# Altium PCB Inverter.PcbDoc (part 3 of 3)
Units mm, origin at the board's own origin, x right, y up, seen from the top; angles counter-clockwise.
Board outline 150 x 100 mm, 2 copper layers (Top Layer, Bottom Layer), stack 1.74 mm thick; 301 components, 198 nets, 1184 pads, 813 vias.
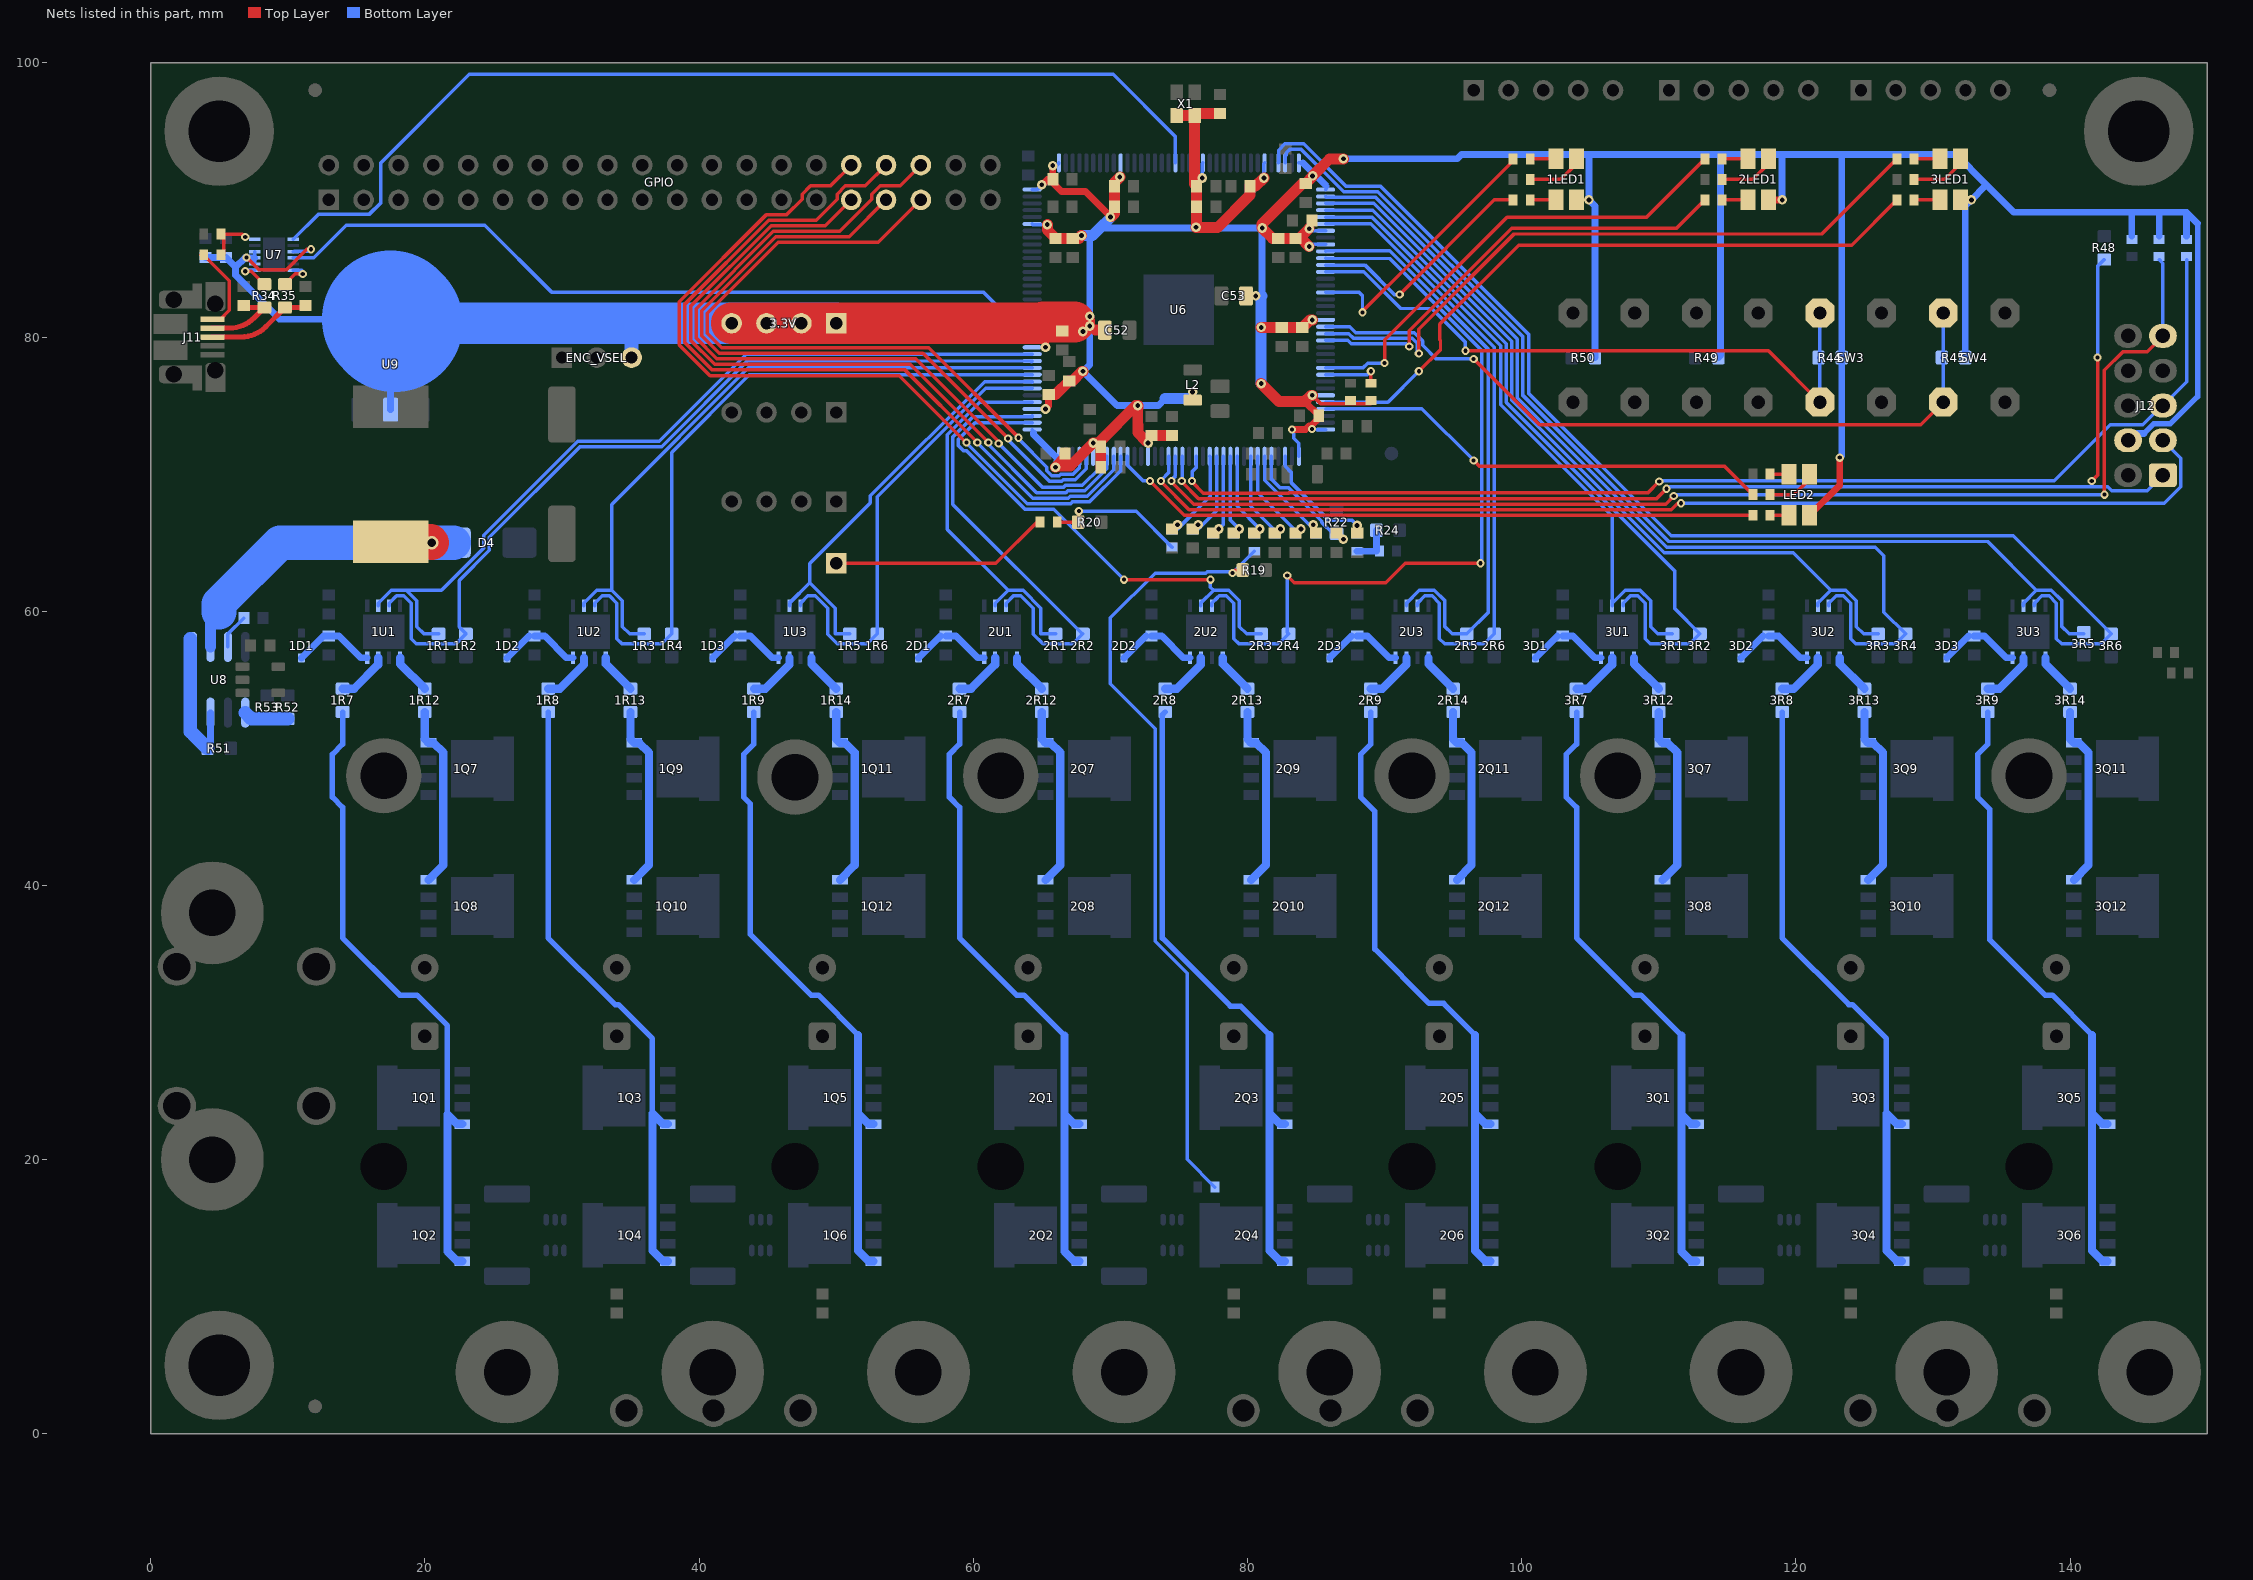
[diagram p3: the nets of this part, all layers, seen from the top]

## Via types
v1: diameter 0.7, hole 0.3, Top Layer to Bottom Layer, 475 vias
v2: diameter 0.7, hole 0.35, Top Layer to Bottom Layer, 233 vias
v3: diameter 0.6, hole 0.3, Top Layer to Bottom Layer, 78 vias
v4: diameter 1.27, hole 0.5, Top Layer to Bottom Layer, 24 vias
v5: diameter 1, hole 0.6, Top Layer to Bottom Layer, 3 vias

## Nets (pads, with @x,y where several pads share a name; then routed paths per layer and width w, separated by ;. In a path a pad name is that pad's centre, name@x,y a point inside that pad or via, vN(x,y) a via of type N, cw(c..) or ccw(c..) an arc to the next point about the centre after c; other vN are vias at no path point) (continued)
LEDG1: 1R16.2 U6.124 | length 19.8
  Top Layer w0.254: v3(88.39,81.8) 88.39,81.867 90.249,83.726 90.262,83.726 99.248,92.711 99.248,92.873 1R16.2@99.375,93
  Bottom Layer w0.254: U6.124@85.7,83.25 88.14,83.25 88.39,83 v3(88.39,81.8)
LEDG2: 2R16.2 U6.135 | length 35
  Top Layer w0.254: v3(90,78.1) 90,79.799 98.933,88.732 109.107,88.732 2R16.2@113.375,93
  Bottom Layer w0.254: U6.135@85.7,77.75 88.431,77.75 88.781,78.1 v3(90,78.1)
LEDG3: 3R16.2 U6.130 | length 49.6
  Top Layer w0.254: v3(92.5,78.8) 92.5,80.575 99.438,87.513 121.888,87.513 3R16.2@127.375,93
  Bottom Layer w0.254: U6.130@85.7,80.25 87.397,80.25 87.733,79.914 92.005,79.914 92.379,79.54 92.379,78.921 v3(92.5,78.8)
LEDR1: 1R15.2 U6.120 | length 17.4
  Top Layer w0.254: v3(91.1,83.1) 98,90 1R15.2@99.375,90
  Bottom Layer w0.254: U6.120@85.7,85.25 88.57,85.25 90.72,83.1 v3(91.1,83.1)
LEDR2: 2R15.2 U6.131 | length 33
  Top Layer w0.254: v3(91.8,79.3) 91.8,80.449 99.27,87.919 111.294,87.919 2R15.2@113.375,90
  Bottom Layer w0.254: U6.131@85.7,79.75 87.322,79.75 87.564,79.508 91.592,79.508 v3(91.8,79.3)
LEDR3: 3R15.2 U6.140 | length 49
  Top Layer w0.254: v3(92.5,77.5) 94.079,79.079 94.079,79.74 94.021,79.799 94.021,80.946 99.775,86.7 124.075,86.7 3R15.2@127.375,90
  Bottom Layer w0.254: U6.140@85.7,75.25 90.25,75.25 v3(92.5,77.5)
NCONFIG: R45.1 SW4.2 U6.129 | length 55.5
  Top Layer w0.254: v3(96.5,78.4) 101.3,73.6 129.1,73.6 SW4.2@130.75,75.25
  Bottom Layer w0.254: U6.129@85.7,80.75 87.472,80.75 87.901,80.321 92.174,80.321 92.786,79.708 92.786,79.395 93.781,78.4 v3(96.5,78.4) ; SW4.2@130.75,75.25 130.75,78.4 R45.1@130.65,78.5 130.75,78.6 SW4.2@130.75,81.75
Net1C4_2: 1C4.2 1D1.K 1U1.8 | length 6.1
  Bottom Layer w0.5: 1D1.K@11,56.6 12.6,58.2 1C4.2@13,58.2 13.75,58.2 15.345,56.605 1U1.8@15.8,56.605
Net1C5_2: 1C5.2 1D2.K 1U2.8 | length 5.7
  Bottom Layer w0.5: 1D2.K@26,56.6 1C5.2@27.6,58.2 ; 1C5.2@28,58.2 28.75,58.2 30.345,56.605 1U2.8@30.8,56.605
Net1C6_2: 1C6.2 1D3.K 1U3.8 | length 5.7
  Bottom Layer w0.5: 1D3.K@41,56.6 1C6.2@42.6,58.2 ; 1C6.2@43,58.2 43.75,58.2 45.345,56.605 1U3.8@45.8,56.605
Net1LED1_1: 1LED1.1 1R15.1 | length 1.9
  Top Layer w0.254: 1R15.1@100.625,90 1LED1.1@102.5,90
Net1LED1_2: 1LED1.2 1R16.1 | length 1.9
  Top Layer w0.254: 1R16.1@100.625,93 1LED1.2@102.5,93
Net1LED1_3: 1LED1.3 1R17.1 | length 4.2
  Top Layer w0.254: 1R17.1@100.625,91.5 102.859,91.5 104,92.641 1LED1.3@104,93
Net1Q1_G: 1Q1.G 1Q2.G 1R7.1 | length 46.6
  Bottom Layer w0.4: 1R7.1@14,52.65 14,50.303 13.25,49.553 13.25,46.447 14,45.697 14,36.172 18.172,32 19.419,32 21.65,29.769 21.65,23.308
  Bottom Layer w0.6: 1Q2.G@22.725,12.595 22.363,12.595 21.65,13.308 21.65,23.308 22.363,22.595 1Q1.G@22.725,22.595
Net1Q3_G: 1Q3.G 1Q4.G 1R8.1 | length 45.5
  Bottom Layer w0.4: 1R8.1@29,52.65 29,36.172 33.872,31.3 34.119,31.3 36.6,28.819 36.6,23.358
  Bottom Layer w0.6: 1Q4.G@37.725,12.595 37.363,12.595 36.6,13.358 36.6,23.358 37.363,22.595 1Q3.G@37.725,22.595
Net1Q5_G: 1Q5.G 1Q6.G 1R9.1 | length 46.3
  Bottom Layer w0.4: 1R9.1@44,52.65 44,50.303 43.25,49.553 43.25,46.447 43.727,45.97 43.727,36.445 48.172,32 48.7,32 51.6,29.1
  Bottom Layer w0.6: 51.6,29.1 51.6,23.358 ; 1Q6.G@52.725,12.595 52.363,12.595 51.6,13.358 51.6,23.358 ; 1Q5.G@52.725,22.595 52.363,22.595 51.6,23.358
Net1Q7_G: 1Q7.G 1Q8.G 1R12.1 | length 13.5
  Bottom Layer w0.6: 1R12.1@20,52.65 20,50.68 1Q7.G@20.275,50.405 20.637,50.405 21.35,49.692 21.35,41.48 1Q8.G@20.275,40.405
Net1Q9_G: 1Q9.G 1Q10.G 1R13.1 | length 13.5
  Bottom Layer w0.6: 1R13.1@35,52.65 35,50.68 1Q9.G@35.275,50.405 35.637,50.405 36.35,49.692 36.35,41.48 1Q10.G@35.275,40.405
Net1Q11_G: 1Q11.G 1Q12.G 1R14.1 | length 13.5
  Bottom Layer w0.6: 1R14.1@50,52.65 50,50.68 1Q11.G@50.275,50.405 50.637,50.405 51.35,49.692 51.35,41.48 1Q12.G@50.275,40.405
Net1R7_2: 1R7.2 1U1.7 | length 3.8
  Bottom Layer w0.6: 1R7.2@14,54.35 14.852,54.35 16.6,56.098 1U1.7@16.6,56.605
Net1R8_2: 1R8.2 1U2.7 | length 3.8
  Bottom Layer w0.6: 1R8.2@29,54.35 29.852,54.35 31.6,56.098 1U2.7@31.6,56.605
Net1R9_2: 1R9.2 1U3.7 | length 3.8
  Bottom Layer w0.6: 1R9.2@44,54.35 44.852,54.35 46.6,56.098 1U3.7@46.6,56.605
Net1R12_2: 1R12.2 1U1.5 | length 3
  Bottom Layer w0.6: 1U1.5@18.2,56.605 18.2,56.15 1R12.2@20,54.35
Net1R13_2: 1R13.2 1U2.5 | length 3
  Bottom Layer w0.6: 1U2.5@33.2,56.605 33.2,56.15 1R13.2@35,54.35
Net1R14_2: 1R14.2 1U3.5 | length 3
  Bottom Layer w0.6: 1U3.5@48.2,56.605 48.2,56.15 1R14.2@50,54.35
Net2C4_2: 2C4.2 2D1.K 2U1.8 | length 5.7
  Bottom Layer w0.5: 2D1.K@56,56.6 2C4.2@57.6,58.2 ; 2C4.2@58,58.2 58.75,58.2 60.345,56.605 2U1.8@60.8,56.605
Net2C5_2: 2C5.2 2D2.K 2U2.8 | length 5.7
  Bottom Layer w0.5: 2D2.K@71,56.6 2C5.2@72.6,58.2 ; 2C5.2@73,58.2 73.75,58.2 75.345,56.605 2U2.8@75.8,56.605
Net2C6_2: 2C6.2 2D3.K 2U3.8 | length 5.7
  Bottom Layer w0.5: 2D3.K@86,56.6 2C6.2@87.6,58.2 ; 2C6.2@88,58.2 88.75,58.2 90.345,56.605 2U3.8@90.8,56.605
Net2LED1_1: 2LED1.1 2R15.1 | length 1.9
  Top Layer w0.254: 2R15.1@114.625,90 2LED1.1@116.5,90
Net2LED1_2: 2LED1.2 2R16.1 | length 1.9
  Top Layer w0.254: 2R16.1@114.625,93 2LED1.2@116.5,93
Net2LED1_3: 2LED1.3 2R17.1 | length 4.2
  Top Layer w0.254: 2R17.1@114.625,91.5 116.859,91.5 118,92.641 2LED1.3@118,93
Net2Q1_G: 2Q1.G 2Q2.G 2R7.1 | length 46.2
  Bottom Layer w0.4: 2R7.1@59,52.65 59,50.303 58.25,49.553 58.25,46.447 59,45.697 59,36.172 63.172,32 63.7,32 66.65,29.05
  Bottom Layer w0.6: 66.65,29.05 66.65,23.308 ; 2Q2.G@67.725,12.595 67.363,12.595 66.65,13.308 66.65,23.308 ; 2Q1.G@67.725,22.595 67.363,22.595 66.65,23.308
Net2Q3_G: 2Q3.G 2Q4.G 2R8.1 | length 45.9
  Bottom Layer w0.4: 2R8.1@74,52.65 73.8,52.45 73.8,36.62 73.8,36.151 78.751,31.2 79.5,31.2 81.6,29.1
  Bottom Layer w0.6: 81.6,29.1 81.6,23.358 ; 2Q4.G@82.725,12.595 82.363,12.595 81.6,13.358 81.6,23.358 ; 2Q3.G@82.725,22.595 82.363,22.595 81.6,23.358
Net2Q5_G: 2Q5.G 2Q6.G 2R9.1 | length 46.6
  Bottom Layer w0.4: 2R9.1@89,52.65 89,50.303 88.25,49.553 88.25,46.447 89.3,45.397 89.3,35.351 93.251,31.4 94.3,31.4 96.6,29.1
  Bottom Layer w0.6: 96.6,29.1 96.6,23.358 ; 2Q6.G@97.725,12.595 97.363,12.595 96.6,13.358 96.6,23.358 ; 2Q5.G@97.725,22.595 97.363,22.595 96.6,23.358
Net2Q7_G: 2Q7.G 2Q8.G 2R12.1 | length 13.5
  Bottom Layer w0.6: 2R12.1@65,52.65 65,50.68 2Q7.G@65.275,50.405 65.637,50.405 66.35,49.692 66.35,41.48 2Q8.G@65.275,40.405
Net2Q9_G: 2Q9.G 2Q10.G 2R13.1 | length 13.5
  Bottom Layer w0.6: 2R13.1@80,52.65 80,50.68 2Q9.G@80.275,50.405 80.637,50.405 81.35,49.692 81.35,41.48 2Q10.G@80.275,40.405
Net2Q11_G: 2Q11.G 2Q12.G 2R14.1 | length 13.5
  Bottom Layer w0.6: 2R14.1@95,52.65 95,50.68 2Q11.G@95.275,50.405 95.637,50.405 96.35,49.692 96.35,41.48 2Q12.G@95.275,40.405
Net2R7_2: 2R7.2 2U1.7 | length 3.8
  Bottom Layer w0.6: 2R7.2@59,54.35 59.852,54.35 61.6,56.098 2U1.7@61.6,56.605
Net2R8_2: 2R8.2 2U2.7 | length 3.8
  Bottom Layer w0.6: 2R8.2@74,54.35 74.852,54.35 76.6,56.098 2U2.7@76.6,56.605
Net2R9_2: 2R9.2 2U3.7 | length 3.8
  Bottom Layer w0.6: 2R9.2@89,54.35 89.852,54.35 91.6,56.098 2U3.7@91.6,56.605
Net2R12_2: 2R12.2 2U1.5 | length 3
  Bottom Layer w0.6: 2U1.5@63.2,56.605 63.2,56.15 2R12.2@65,54.35
Net2R13_2: 2R13.2 2U2.5 | length 3
  Bottom Layer w0.6: 2U2.5@78.2,56.605 78.2,56.15 2R13.2@80,54.35
Net2R14_2: 2R14.2 2U3.5 | length 3
  Bottom Layer w0.6: 2U3.5@93.2,56.605 93.2,56.15 2R14.2@95,54.35
Net3C4_2: 3C4.2 3D1.K 3U1.8 | length 5.7
  Bottom Layer w0.5: 3D1.K@101,56.6 3C4.2@102.6,58.2 ; 3C4.2@103,58.2 103.75,58.2 105.345,56.605 3U1.8@105.8,56.605
Net3C5_2: 3C5.2 3D2.K 3U2.8 | length 5.7
  Bottom Layer w0.5: 3D2.K@116,56.6 3C5.2@117.6,58.2 ; 3C5.2@118,58.2 118.75,58.2 120.345,56.605 3U2.8@120.8,56.605
Net3C6_2: 3C6.2 3D3.K 3U3.8 | length 5.7
  Bottom Layer w0.5: 3D3.K@131,56.6 3C6.2@132.6,58.2 ; 3C6.2@133,58.2 133.75,58.2 135.345,56.605 3U3.8@135.8,56.605
Net3LED1_1: 3LED1.1 3R15.1 | length 1.9
  Top Layer w0.254: 3R15.1@128.625,90 3LED1.1@130.5,90
Net3LED1_2: 3LED1.2 3R16.1 | length 1.9
  Top Layer w0.254: 3R16.1@128.625,93 3LED1.2@130.5,93
Net3LED1_3: 3LED1.3 3R17.1 | length 4.2
  Top Layer w0.254: 3R17.1@128.625,91.5 130.859,91.5 132,92.641 3LED1.3@132,93
Net3Q1_G: 3Q1.G 3Q2.G 3R7.1 | length 46.2
  Bottom Layer w0.4: 3R7.1@104,52.65 104,50.303 103.25,49.553 103.25,46.447 104,45.697 104,36.172 108.172,32 108.7,32 111.65,29.05
  Bottom Layer w0.6: 111.65,29.05 111.65,23.308 ; 3Q2.G@112.725,12.595 112.363,12.595 111.65,13.308 111.65,23.308 ; 3Q1.G@112.725,22.595 112.363,22.595 111.65,23.308
Net3Q3_G: 3Q3.G 3Q4.G 3R8.1 | length 45.5
  Bottom Layer w0.4: 3R8.1@119,52.65 119,36.172 123.872,31.3 124.119,31.3 126.6,28.819 126.6,23.358
  Bottom Layer w0.6: 3Q4.G@127.725,12.595 127.363,12.595 126.6,13.358 126.6,23.358 127.363,22.595 3Q3.G@127.725,22.595
Net3Q5_G: 3Q5.G 3Q6.G 3R9.1 | length 46.3
  Bottom Layer w0.4: 3R9.1@134,52.65 134,50.303 133.25,49.553 133.25,46.447 134.127,45.57 134.127,36.045 138.172,32 138.7,32 141.6,29.1
  Bottom Layer w0.6: 141.6,29.1 141.6,23.358 ; 3Q6.G@142.725,12.595 142.363,12.595 141.6,13.358 141.6,23.358 ; 3Q5.G@142.725,22.595 142.363,22.595 141.6,23.358
Net3Q7_G: 3Q7.G 3Q8.G 3R12.1 | length 13.5
  Bottom Layer w0.6: 3R12.1@110,52.65 110,50.68 3Q7.G@110.275,50.405 110.637,50.405 111.35,49.692 111.35,41.48 3Q8.G@110.275,40.405
Net3Q9_G: 3Q9.G 3Q10.G 3R13.1 | length 13.5
  Bottom Layer w0.6: 3R13.1@125,52.65 125,50.68 3Q9.G@125.275,50.405 125.637,50.405 126.35,49.692 126.35,41.48 3Q10.G@125.275,40.405
Net3Q11_G: 3Q11.G 3Q12.G 3R14.1 | length 13.5
  Bottom Layer w0.6: 3R14.1@140,52.65 140,50.68 3Q11.G@140.275,50.405 140.637,50.405 141.35,49.692 141.35,41.48 3Q12.G@140.275,40.405
Net3R7_2: 3R7.2 3U1.7 | length 3.8
  Bottom Layer w0.6: 3R7.2@104,54.35 104.852,54.35 106.6,56.098 3U1.7@106.6,56.605
Net3R8_2: 3R8.2 3U2.7 | length 3.8
  Bottom Layer w0.6: 3R8.2@119,54.35 119.852,54.35 121.6,56.098 3U2.7@121.6,56.605
Net3R9_2: 3R9.2 3U3.7 | length 3.8
  Bottom Layer w0.6: 3R9.2@134,54.35 134.852,54.35 136.6,56.098 3U3.7@136.6,56.605
Net3R12_2: 3R12.2 3U1.5 | length 3
  Bottom Layer w0.6: 3U1.5@108.2,56.605 108.2,56.15 3R12.2@110,54.35
Net3R13_2: 3R13.2 3U2.5 | length 3
  Bottom Layer w0.6: 3U2.5@123.2,56.605 123.2,56.15 3R13.2@125,54.35
Net3R14_2: 3R14.2 3U3.5 | length 3
  Bottom Layer w0.6: 3U3.5@138.2,56.605 138.2,56.15 3R14.2@140,54.35
NetC12_2: C12.2 R22.1 U6.5 | length 8.1
  Bottom Layer w0.254: U6.5@81.75,71.3 81.75,69.631 82.36,69.021 82.969,69.021 85.429,66.561 85.429,66.471 86.25,65.65 R22.1@86.5,65.65
  other v2: 87,65.25
NetC13_2: C13.2 R25.1 U6.3 | length 8.8
  Bottom Layer w0.254: U6.3@82.75,71.3 82.75,70.568 83.179,70.139 83.179,69.391 85.95,66.621 87.629,66.621 v2(88,66.25) R25.1@88,65.625
NetC14_2: C14.2 R26.1 U6.6 | length 7.4
  Bottom Layer w0.254: U6.6@81.25,71.3 81.25,69.556 84.506,66.3 v2(84.8,66.3) 84.8,65.825 R26.1@85,65.625
NetC15_2: C15.2 R27.1 U6.7 | length 6.8
  Bottom Layer w0.254: U6.7@80.75,71.3 80.75,68.65 83.5,65.9 R27.1@83.5,65.625
  other v2: 83.9,66
NetC16_2: C16.2 R28.1 U6.8 | length 6.4
  Bottom Layer w0.254: U6.8@80.25,71.3 80.25,67.65 82,65.9 R28.1@82,65.625
  other v2: 82.4,66
NetC17_2: C17.2 R29.1 U6.10 | length 6
  Bottom Layer w0.254: U6.10@79.25,71.3 79.25,67.65 v2(80.9,66)
NetC18_2: C18.2 R30.1 U6.11 | length 5.6
  Bottom Layer w0.254: U6.11@78.75,71.3 78.75,66.65 v2(79.4,66)
NetC19_2: C19.2 R31.1 U6.12 | length 5.4
  Bottom Layer w0.254: v2(77.9,66) 78.25,66.35 U6.12@78.25,71.3
NetC20_2: C20.2 R32.1 U6.13 | length 5.9
  Bottom Layer w0.254: v2@76.4,66 77.75,67.35 U6.13@77.75,71.3
  other v2: 76.4,66.3
NetC21_2: C21.2 R33.1 U6.14 | length 6.5
  Bottom Layer w0.254: v2@74.9,66 77.289,68.389 77.289,71.261 U6.14@77.25,71.3 ; v2(74.9,66.3) v2@74.9,66.529
NetC42_2: C42.2 U8.3 | length 2.6
  Bottom Layer w0.254: U8.3@5.635,57.4 5.635,58.335 C42.2@6.8,59.5
NetD4_K: D4.K L1.2 U8.2 | length 25.4
  Top Layer w2.54: L1.2@17.5,65.075 20.425,65.075 v5(20.5,65)
  Bottom Layer w0.8: U8.2@4.365,57.4 4.365,59.265 5,59.9
  Bottom Layer w2.54: 4.978,59.922 4.978,60.539 9.438,65 v5(20.5,65) D4.K@22.1,65
NetJ11_1: J11.1 R36.2 | length 6.5
  Top Layer w0.254: R36.2@3.65,86 3.85,86 5.734,84.116 5.734,81.938 5.096,81.3 J11.1@4.525,81.3
NetLED2_1: LED2.1 R38.1 | length 1.4
  Top Layer w0.254: R38.1@118.125,67 LED2.1@119.5,67
NetLED2_2: LED2.2 R39.1 | length 1.4
  Top Layer w0.254: R39.1@118.125,70 LED2.2@119.5,70
NetLED2_3: LED2.3 R40.1 | length 3.7
  Top Layer w0.254: R40.1@118.125,68.5 119.859,68.5 121,69.641 LED2.3@121,70
NetR18_1: R18.1 R20.2 R33.2 | length 10
  Top Layer w0.254: R18.1@66.35,66.5 R20.2@67.65,66.5 67.7,66.55 v3(67.7,67.3)
  Bottom Layer w0.254: v3(67.7,67.3) 71.875,67.3 R33.2@74.5,64.675
NetR18_2: R18.2 V_AUX.1 | length 15.9
  Top Layer w0.254: V_AUX.1@50,63.5 61.65,63.5 R18.2@64.65,66.5
NetR19_1: R19.1 R21.2 R29.2 | length 58.1
  Top Layer w0.254: v3(78.904,62.779) 79.125,63 R19.1@79.65,63
  Bottom Layer w0.254: R21.2@77.625,18 75.609,20.016 75.609,33.597 73.273,35.933 73.273,36.402 73.273,51.427 70,54.7 70,59.512 73.267,62.779 76.96,62.779 77.06,62.879 78.804,62.879 v3(78.904,62.779) R29.2@80.5,64.375
NetR23_1: R23.1 R24.2 R25.2 | length 2.9
  Bottom Layer w0.5: R25.2@88,64.375 89.375,64.375 89.4,64.4 R24.2@89.4,65.9
NetR34_1: R34.1 U7.1 | length 2.5
  Top Layer w0.254: v3(6.9,84.8) 7.35,84.8 R34.1@8.3,83.85
  Bottom Layer w0.254: v3(6.9,84.8) 6.975,84.875 U7.1@7.585,84.875
NetR35_1: R35.1 U7.12 | length 2.5
  Top Layer w0.254: R35.1@9.8,83.85 10.55,84.6 v3(11.1,84.6)
  Bottom Layer w0.254: U7.12@10.415,84.875 11.025,84.875 11.1,84.8 v3(11.1,84.6)
NetR36_1: R36.1 R37.2 U7.6 | length 3.1
  Top Layer w0.254: R36.1@5.35,86 5.35,87.5 6.7,87.5 v3(6.9,87.3)
NetR51_1: R51.1 U8.1 U8.7 U8.8 | length 11
  Bottom Layer w0.254: R51.1@4.15,50 R51.1@4.365,50.215
  Bottom Layer w0.5: R51.1@4.365,50.215 U8.7@4.365,52.6
  Bottom Layer w1: 2.895,51.2 U8.1@2.895,58 ; 3.095,51.055 R51.1@4.15,50
NetR52_2: R52.2 R53.2 U8.5 | length 3.3
  Bottom Layer w1: U8.5@6.905,52.6 7.355,52.15 R53.2@8.5,52.15 R52.2@10,52.15
NSTATUS: R47.1 U6.136 | length 4.1
  Top Layer w0.254: R47.1@89,76.85 v3(89,77.5)
  Bottom Layer w0.254: U6.136@85.7,77.25 88.75,77.25 v3(89,77.5)
PWM_AH1: 1R1.2 1U1.2 U6.48 | length 60.8
  Bottom Layer w0.254: 1U1.2@16.6,60.395 16.6,60.59 17.541,61.531 18.634,61.531 ; 1R1.2@21,58.35 19.936,58.35 19.406,58.88 19.406,60.758 18.634,61.531 ; U6.48@64.3,78.75 43.45,78.75 37.106,72.406 31.148,72.406 24.294,65.552 24.294,64.61 21.215,61.531 18.634,61.531
PWM_AH2: 2R1.2 2U1.2 U6.41 | length 27.8
  Bottom Layer w0.254: 2U1.2@61.6,60.395 61.6,60.59 62.541,61.531 ; U6.41@64.3,75.25 60.481,75.25 58.108,72.877 58.108,65.964 62.541,61.531 ; 2R1.2@66,58.35 64.936,58.35 64.936,60.229 63.634,61.531 62.541,61.531
PWM_AH3: 3R1.2 3U1.2 U6.113 | length 46.4
  Bottom Layer w0.254: U6.113@85.7,88.75 89.068,88.75 98.468,79.35 98.468,75.058 106.6,66.926 3U1.2@106.6,60.395 106.6,60.59 107.541,61.531 108.634,61.531 109.406,60.758 109.406,58.88 109.936,58.35 3R1.2@111,58.35
PWM_AL1: 1R2.2 1U1.3 U6.47 | length 62.5
  Bottom Layer w0.254: 1U1.3@17.4,60.395 17.4,60.59 17.934,61.124 18.466,61.124 19,60.59 19,58 19.379,57.621 22.271,57.621 1R2.2@23,58.35 22.5,58.85 22.5,62.241 24.7,64.441 24.7,65.384 31.316,72 37.275,72 43.525,78.25 U6.47@64.3,78.25 U6.47@64.229,78.179
PWM_AL2: 2R2.2 2U1.3 U6.39 | length 33.7
  Bottom Layer w0.254: 2U1.3@62.4,60.395 62.4,60.59 62.934,61.124 63.466,61.124 64.379,60.211 64.379,58.332 65.091,57.621 67.271,57.621 2R2.2@68,58.35 67.95,58.35 58.514,67.786 58.514,72.708 59.985,74.179 64.3,74.179 U6.39@64.3,74.25
PWM_AL3: 3R2.2 3U1.3 U6.112 | length 53.5
  Bottom Layer w0.254: U6.112@85.7,89.25 89.143,89.25 98.874,79.519 98.874,75.227 111.179,62.922 111.179,60.171 3R2.2@113,58.35 112.271,57.621 109.379,57.621 109,58 109,60.59 108.466,61.124 107.934,61.124 107.4,60.59 3U1.3@107.4,60.395
PWM_BH1: 1R3.2 1U2.2 U6.46 | length 48.5
  Bottom Layer w0.254: 1U2.2@31.6,60.395 31.6,60.59 32.541,61.531 33.634,61.531 ; 1R3.2@36,58.35 34.936,58.35 34.406,58.88 34.406,60.758 33.634,61.531 ; U6.46@64.3,77.75 43.6,77.75 33.634,67.785 33.634,61.531
PWM_BH2: 2R3.2 2U2.2 U6.38 | length 37.1
  Top Layer w0.254: v3(71,62.3) v3(77.3,62.3)
  Bottom Layer w0.254: U6.38@64.3,73.75 60.131,73.75 58.92,72.54 58.92,72.06 59.26,71.72 59.485,71.72 63.774,67.432 65.868,67.432 v3(71,62.3) ; 2U2.2@76.6,60.395 76.6,60.6 77.531,61.531 ; v3(77.3,62.3) 77.3,61.762 77.531,61.531 ; 2R3.2@81,58.35 79.936,58.35 79.406,58.88 79.406,60.758 78.634,61.531 77.531,61.531
PWM_BH3: 3R3.2 3U2.2 U6.111 | length 58.4
  Bottom Layer w0.254: U6.111@85.7,89.75 89.218,89.75 99.281,79.687 99.281,75.395 110.403,64.273 119.798,64.273 122.541,61.531 ; 3U2.2@121.6,60.395 121.6,60.59 122.541,61.531 ; 3R3.2@126,58.35 124.936,58.35 124.406,58.88 124.406,60.758 123.634,61.531 122.541,61.531
PWM_BL1: 1R4.2 1U2.3 U6.45 | length 51.2
  Bottom Layer w0.254: 1U2.3@32.4,60.395 32.4,60.59 32.934,61.124 33.466,61.124 34,60.59 34,58 34.379,57.621 37.271,57.621 1R4.2@38,58.35 38,71.576 43.674,77.25 U6.45@64.3,77.25
PWM_BL2: 2R4.2 2U2.3 U6.119 | length 58.3
  Top Layer w0.254: v3(82.9,62.6) 83.427,62.073 90.073,62.073 91.5,63.5 v3(97,63.5)
  Bottom Layer w0.254: 2U2.3@77.4,60.395 77.4,60.59 77.814,61.004 ; 77.771,60.961 77.934,61.124 78.466,61.124 79,60.59 79,58 79.379,57.621 82.271,57.621 2R4.2@83,58.35 82.9,58.45 v3(82.9,62.6) ; U6.119@85.7,85.75 85.7,85.727 90.367,85.727 97.079,79.015 97.079,63.579 v3(97,63.5)
PWM_BL3: 3R4.2 3U2.3 U6.110 | length 69.7
  Bottom Layer w0.254: U6.110@85.7,90.25 85.749,90.201 89.342,90.201 99.687,79.855 99.687,75.563 110.571,64.679 125.781,64.679 126.421,64.04 126.421,59.929 3R4.2@128,58.35 127.271,57.621 124.379,57.621 124,58 124,60.59 123.466,61.124 122.934,61.124 122.4,60.59 3U2.3@122.4,60.395
PWM_CH1: 1R5.2 1U3.2 U6.44 | length 31.3
  Bottom Layer w0.254: 1U3.2@46.6,60.395 46.6,60.6 48.082,62.082 ; 1R5.2@51,58.35 49.936,58.35 49.936,60.229 48.082,62.082 ; U6.44@64.3,76.706 U6.44@64.3,76.75 60.832,76.75 52.5,68.418 52.5,67.895 48.082,63.478 48.082,62.082
PWM_CH2: 2R5.2 2U3.2 U6.118 | length 43.7
  Bottom Layer w0.254: U6.118@85.7,86.25 85.733,86.283 90.385,86.283 97.579,79.089 97.579,59.929 2R5.2@96,58.35 94.936,58.35 94.406,58.88 94.406,60.758 93.634,61.531 92.541,61.531 91.6,60.59 2U3.2@91.6,60.395
PWM_CH3: 3R5.2 3U3.2 U6.106 | length 78.9
  Bottom Layer w0.254: U6.106@82.75,92.7 82.75,93.249 82.821,93.249 82.821,93.428 83.072,93.679 83.937,93.679 87.009,90.607 89.51,90.607 100.094,80.024 100.094,75.732 110.739,65.086 133.986,65.086 137.541,61.531 ; 3U3.2@136.6,60.395 136.6,60.59 137.541,61.531 ; 3R5.2@141,58.35 139.936,58.35 139.406,58.88 139.406,60.758 138.634,61.531 137.541,61.531
PWM_CL1: 1R6.2 1U3.3 U6.43 | length 33.4
  Bottom Layer w0.254: 1U3.3@47.4,60.395 47.4,60.59 47.934,61.124 48.466,61.124 49.379,60.211 49.379,58.332 50.091,57.621 52.271,57.621 1R6.2@53,58.35 53,68.344 60.906,76.25 U6.43@64.3,76.25
PWM_CL2: 2R6.2 2U3.3 U6.114 | length 46.2
  Bottom Layer w0.254: U6.114@85.7,88.25 88.994,88.25 98,79.244 2R6.2@98,58.35 97.271,57.621 94.379,57.621 94,58 94,60.59 93.466,61.124 92.934,61.124 92.4,60.59 2U3.3@92.4,60.395
PWM_CL3: 3R6.2 3U3.3 U6.105 | length 88.5
  Bottom Layer w0.254: U6.105@82.25,92.7 82.279,92.729 82.279,93.631 82.734,94.086 84.105,94.086 87.177,91.013 89.679,91.013 100.5,80.192 100.5,75.9 110.908,65.492 135.858,65.492 3R6.2@143,58.35 142.271,57.621 139.379,57.621 139,58 139,60.59 138.466,61.124 137.934,61.124 137.4,60.59 3U3.3@137.4,60.395
RESET_N: R44.1 SW3.2 U6.121 | length 46.9
  Top Layer w0.254: v3(95.9,79) 118,79 SW3.2@121.75,75.25
  Bottom Layer w0.254: U6.121@85.7,84.75 88.496,84.75 91.166,82.079 93.44,82.079 95.9,79.619 v3(95.9,79) ; SW3.2@121.75,75.25 121.75,78.4 R44.1@121.65,78.5 121.75,78.6 SW3.2@121.75,81.75
RXD: U6.52 U7.10 | length 57.9
  Bottom Layer w0.254: U7.10@10.415,85.775 11.894,85.775 14.277,88.158 24.362,88.158 29.239,83.281 60.719,83.281 63.25,80.75 U6.52@64.3,80.75
SGPIO31: GPIO.31 U6.29 | length 54.1
  Top Layer w0.254: GPIO.31@51.1,90 49.219,88.119 45.259,88.119 39.381,82.242 39.381,79.758 41.138,78.001 55.418,78.001 61.1,72.319 v3(61.1,72.3)
  Bottom Layer w0.254: v3(61.1,72.3) 61.1,72.164 64.613,68.651 66.766,68.651 66.895,68.781 68.133,68.781 69.75,70.398 U6.29@69.75,71.3
SGPIO32: GPIO.32 U6.27 | length 59.1
  Top Layer w0.254: GPIO.32@51.1,92.54 49.589,91.029 48.134,91.029 47.531,90.426 47.531,90.055 46.408,88.932 44.922,88.932 38.569,82.579 38.569,79.421 40.801,77.189 54.611,77.189 v3(59.5,72.3)
  Bottom Layer w0.254: v3(59.5,72.3) 59.5,72.28 63.942,67.838 67.102,67.838 67.232,67.968 68.469,67.968 70.75,70.249 U6.27@70.75,71.3
SGPIO33: GPIO.33 U6.32 | length 52.4
  Top Layer w0.254: GPIO.33@53.64,90 50.946,87.306 45.595,87.306 40.194,81.905 40.194,80.095 41.475,78.814 56.333,78.814 v3(62.548,72.6)
  Bottom Layer w0.254: v3(62.548,72.6) 62.548,72.487 65.571,69.464 66.429,69.464 66.558,69.594 67.445,69.594 68.25,70.398 U6.32@68.25,71.3
SGPIO34: GPIO.34 U6.28 | length 59.7
  Top Layer w0.254: GPIO.34@53.64,92.54 52.129,91.029 50.674,91.029 50.071,90.426 50.071,90.055 48.541,88.526 45.09,88.526 38.975,82.41 38.975,79.59 40.97,77.595 55.024,77.595 60.3,72.32 v3(60.3,72.3)
  Bottom Layer w0.254: v3(60.3,72.3) 60.3,72.28 64.335,68.245 66.934,68.245 67.063,68.374 68.301,68.374 70.25,70.324 U6.28@70.25,71.3
SGPIO35: GPIO.35 U6.33 | length 53.2
  Top Layer w0.254: GPIO.35@56.18,90 53.08,86.9 45.764,86.9 40.601,81.737 40.601,80.263 41.643,79.221 56.746,79.221 63.3,72.667 v3(63.3,72.649)
  Bottom Layer w0.254: v3(63.3,72.649) 63.3,72.581 65.37,70.51 65.37,70.239 65.739,69.87 66.261,69.87 66.39,70 67.277,70 67.75,70.473 U6.33@67.75,71.3
SGPIO36: GPIO.36 U6.30 | length 58.5
  Top Layer w0.254: GPIO.36@56.18,92.54 54.669,91.029 53.214,91.029 52.611,90.426 52.611,90.055 50.269,87.713 45.427,87.713 39.788,82.074 39.788,79.926 41.306,78.408 55.811,78.408 61.854,72.365 v3(61.854,72.23)
  Bottom Layer w0.254: v3(61.854,72.23) 65.026,69.058 66.597,69.058 66.727,69.187 67.964,69.187 69.25,70.473 U6.30@69.25,71.3
STATUSLED_B: R40.2 U6.141 | length 33.8
  Top Layer w0.254: v3(96.5,71) 96.921,70.579 114.796,70.579 R40.2@116.875,68.5
  Bottom Layer w0.254: U6.141@85.7,74.75 85.729,74.779 92.721,74.779 v3(96.5,71)
STATUSLED_R: R38.2 U6.26 | length 47.8
  Top Layer w0.254: v3(72.9,69.5) 72.9,69.481 75.392,66.989 116.864,66.989 R38.2@116.875,67
  Bottom Layer w0.254: U6.26@71.25,71.3 71.25,70.643 72.393,69.5 v3(72.9,69.5)
TCK: J12.1 R48.2 U6.18 | length 91.9
  Top Layer w0.254: v3(75.205,69.5) 75.205,69.433 76.43,68.208 83.177,68.208 83.188,68.219 109.847,68.219 v3(110.564,68.936) ; v3(141.579,69.5) 142,69.921 v3(142,78.5)
  Bottom Layer w0.254: v3(75.205,69.5) 75.25,69.545 U6.18@75.25,71.3 ; v3(110.564,68.936) 110.708,69.079 142.74,69.079 143.042,68.777 145.627,68.777 J12.1@146.77,69.92 ; 141.579,69.079 v3(141.579,69.5) ; v3(142,78.5) 142,85.15 R48.2@142.5,85.65
TDI: J12.9 R42.1 U6.19 | length 91.1
  Top Layer w0.254: v3(74.452,69.5) 74.452,69.433 76.084,67.801 83.345,67.801 83.356,67.813 110.505,67.813 v3(111.096,68.404) ; v3(142.5,68.5) 142.5,77.579 143.858,78.937 145.627,78.937 J12.9@146.77,80.08
  Bottom Layer w0.254: v3(74.452,69.5) 74.452,69.567 74.75,69.865 U6.19@74.75,71.3 ; v3(111.096,68.404) 111.192,68.5 v3(142.5,68.5) ; R42.1@146.5,85.65 146.77,85.38 J12.9@146.77,80.08
TDO: J12.3 U6.20 | length 81.9
  Top Layer w0.254: v3(73.7,69.5) 73.7,69.433 75.738,67.395 83.513,67.395 83.525,67.406 110.918,67.406 111.383,67.872 v3(111.628,67.872)
  Bottom Layer w0.254: v3(73.7,69.5) 73.7,69.567 74.25,70.117 U6.20@74.25,71.3 ; v3(111.628,67.872) 146.87,67.872 148.065,69.067 148.065,71.165 J12.3@146.77,72.46
TMS: J12.5 R41.1 U6.16 | length 87.2
  Top Layer w0.254: v3(75.957,69.5) 75.957,69.433 76.776,68.614 83.008,68.614 83.02,68.626 109.19,68.626 v3(110.032,69.468)
  Bottom Layer w0.254: v3(75.957,69.5) 75.957,70.18 76.25,70.473 U6.16@76.25,71.3 ; v3(110.032,69.468) 110.079,69.515 138.847,69.515 142.935,73.603 145.287,73.603 146.684,75 J12.5@146.77,75 148.5,76.73 R41.1@148.5,85.65
TXD: U6.90 U7.7 | length 74.8
  Bottom Layer w0.254: U7.7@10.415,87.125 12.261,88.971 15.966,88.971 16.8,89.804 16.8,92.716 23.247,99.163 70.202,99.163 74.75,94.615 U6.90@74.75,92.7
USB_N: C22.2 J11.2 R34.2 | length 5.8
  Top Layer w0.381: J11.2@4.525,80.65 5.748,80.65 ccw(c5.748,83.19) 7.544,81.394 R34.2@8.3,82.15 6.95,82.15 C22.2@6.8,82.3
USB_P: C23.2 J11.3 R35.2 | length 7.6
  Top Layer w0.381: J11.3@4.525,80 6.598,80 ccw(c6.598,82.54) 8.394,80.744 R35.2@9.8,82.15 11.15,82.15 C23.2@11.3,82.3
VCC: 1LED1.4 2LED1.4 3.3V.1 3.3V.2 3.3V.3 3.3V.4 3LED1.4 C26.2 C27.2 C28.2 C29.2 C30.2 C31.2 C32.2 C33.2 C34.2 C35.2 C36.2 C37.2 C38.2 C39.2 C40.2 C41.2 C43.2 C45.2 C52.2 C53.2 C54.2 C55.2 C56.2 C57.2 C58.2 C59.2 C65.2 C66.2 ENC_VSEL.3 J12.4 L2.2 LED2.4 R41.2 R42.2 R43.2 R44.2 R45.2 R46.2 R47.2 R49.2 R50.2 U6.1 U6.23 U6.31 U6.36 U6.37 U6.40 U6.49 U6.51 U6.67 U6.72 U6.73 U6.82 U6.94 U6.103 U6.108 U6.109 U6.115 U6.117 U6.128 U6.139 U6.144 U7.2 U7.3 U7.4 U7.9 U9.2 U9.4 X1.1 X1.4 | length 402.7
  Top Layer w0.254: v3(7,85.8) 7.879,84.921 9.921,84.921 11.4,86.4 v3(11.7,86.4) ; v2(84.727,75.75) 85.327,75.15 R47.2@89,75.15
  Top Layer w0.5: v2(65,91.1) 65.4,91.5 C57.2@65.8,91.5 ; 65.013,81 65.273,80.741 v2(65.273,79.25) ; v2(65.273,74.75) 65.5,74.977 C28.2@65.5,75.8 ; v2(65.8,92.5) C57.2@65.8,91.5 ; v2@70.1,88.8 70,88.8 68.198,90.602 66.443,90.602 65.8,91.245 C57.2@65.8,91.5 ; v3(83.25,73.25) 84.25,73.25 v3@84.5,73.5 ; 84,75.3 84.169,75.3 85.2,74.269 C54.2@85.2,74.25 85.2,74.1 84.55,73.45 v3(84.7,73.3) ; 2LED1.4@118,90 v2(119,90) ; LED2.4@121,67 123.2,69.2 v3(123.2,71.2)
  Top Layer w0.8: v2(65.4,88.2) 65.4,87.8 C30.2@66,87.2 C38.2@67.25,87.2 67.7,87.2 v2(67.9,87.4) ; C28.2@65.5,75.8 66,75.8 C36.2@67,76.8 67.231,76.8 67.931,77.5 v2(68,77.5) ; v2(66,70.5) 66.7,71.2 C55.2@66.7,71.5 ; v2@66.1,70.6 67.077,70.6 v2(68.75,72.273) C27.2@69.273,72.273 ; 68.9,80.5 C52.2@69.6,80.5 ; C35.2@69.3,70.5 C27.2@69.3,72 69.3,72.245 C27.2@69.273,72.273 ; v2@70.1,88.8 70.3,89 C39.2@70.3,89.5 C31.2@70.3,91 70.3,91.277 v2(70.691,91.669) ; C26.2@72.611,72.411 72,73.023 72,73.569 71.998,73.571 71.998,74.829 72,74.831 v2(72,75) 71.853,75 69.273,72.42 C27.2@69.273,72.273 ; C26.2@73,72.8 C34.2@74.5,72.8 ; X1.4@74.85,96.15 X1.1@76.15,96.15 ; C65.2@78,96.3 76.3,96.3 X1.1@76.15,96.15 ; v2(81,76.6) 82.3,75.3 84,75.3 ; v2(81,80.7) C41.2@82.5,80.7 C33.2@84,80.7 84.55,81.25 v2(84.727,81.25) ; v2(81.2,91.6) 80.6,91 C66.2@80.2,91 80.2,90.369 77.831,88 v2(76.25,88) 76.3,88.05 C40.2@76.3,89.5 C32.2@76.3,91 76.15,91.15 X1.1@76.15,96.15 ; 84.169,75.3 84.619,75.75 v2(84.727,75.75) ; v2(84.5,86.6) 83.9,87.2 C29.2@83.8,87.2 ; v2(84.5,87.9) C29.2@83.8,87.2 ; v2(87,93) 86,93 v2(84.75,91.75) 84.75,91.7 C58.2@84.25,91.2 84.019,91.2 81.072,88.254 v2(81.072,87.95) 81.822,87.2 C37.2@82.25,87.2 C29.2@83.5,87.2 C29.2@83.8,87.2
  Top Layer w3: 3.3V.4@42.38,81 3.3V.3@44.92,81 3.3V.2@47.46,81 3.3V.1@50,81 65.013,81 65.116,81.102 67.384,81.102
  Bottom Layer w0.254: U7.2@7.585,85.325 U7.3@7.585,85.775 U7.4@7.585,86.225 ; U7.9@10.415,86.225 10.459,86.269 11.569,86.269 v3(11.7,86.4) ; U6.37@64.3,73.25 64.3,73.1 64.4,73 ; U6.51@64.3,80.25 64.957,80.25 65.279,79.928 65.279,79.257 v2(65.273,79.25) ; U6.67@64.3,88.25 64.35,88.2 v2(65.4,88.2) ; U6.72@64.3,90.75 64.65,90.75 v2(65,91.1) ; v2(65.8,92.5) 66.1,92.5 66.25,92.65 U6.73@66.25,92.7 ; v2(66,70.5) 65.973,70.527 65.973,71.023 U6.36@66.25,71.3 66,71.3 ; v2(76.7,91.6) 76.7,92.65 U6.94@76.75,92.7 ; v2(81.2,91.6) 81.2,92.65 U6.103@81.25,92.7 ; v3(83.25,73.25) 83.377,73.123 83.377,72.615 83.75,72.243 U6.1@83.75,71.3 ; U6.108@83.75,92.7 84.05,92.7 ; v2@84.75,86.75 U6.117@85.7,86.75 ; 84.85,87.75 U6.115@85.7,87.75 ; U6.144@85.043,73.25 U6.144@85.7,73.25 ; U6.109@85.7,90.75 85.75,90.8 85.75,91
  Bottom Layer w0.4: 145.402,72.964 146.114,73.676 147.318,73.676 149.3,75.658 149.3,88.295
  Bottom Layer w0.5: C45.2@4,85.8 C43.2@5.5,85.8 6.198,85.102 6.198,85.098 ; v3(7,85.8) 6.9,85.8 v3@6.875,85.775 ; U7.3@7.585,85.775 v3@6.875,85.775 ; U9.2@17.5,74.7 17.5,80.7 U9.4@17.8,81 ; U9.4@17.5,81.3 9.407,81.3 6.198,84.509 6.198,85.098 ; 64.4,73 64.4,72.9 66,71.3 ; v2@68.5,80.9 68.5,78 v2(68,77.5) 70.5,75 v2(72,75) 73.5,75 74,75.5 ; v2@68.5,81.6 68.5,87.4 ; 69.25,87.95 v2(81.072,87.95) 81.072,83 ; 84.05,92.7 85.75,91 ; v2(87,93) 95.3,93 95.6,93.3 104.9,93.3 ; R50.2@105.35,78.5 105.35,89.55 v2(104.9,90) 104.9,93.3 ; R49.2@114.35,78.5 114.5,78.65 114.5,93.3 ; v2(119,90) 119,93.3 ; v3(123.2,71.2) 123.35,71.35 R44.2@123.35,78.5 123.35,93.15 123.5,93.3 ; R45.2@132.35,78.5 132.35,89.55 v2(132.8,90) 133.801,91.001 133.801,91.199 ; J12.4@144.23,72.46 144.734,72.964 145.402,72.964 ; R43.2@144.5,87.35 144.5,89.098 ; R42.2@146.5,87.35 146.5,89.098 ; R41.2@148.5,87.35 148.5,89.095 ; 149.3,88.295 148.5,89.095 ; 6.198,85.098 v3@6.875,85.775 ; 104.9,93.3 114.5,93.3 ; 114.5,93.3 119,93.3 ; 119,93.3 123.5,93.3 ; 123.5,93.3 131.7,93.3 133.801,91.199 ; 133.801,91.199 135.902,89.098 144.5,89.098 ; 144.5,89.098 146.5,89.098 ; 146.5,89.098 148.498,89.098 148.5,89.095
  Bottom Layer w0.8: v2(67.9,87.4) 68.5,87.4 68.7,87.4 69.25,87.95 70,88.7 v2(70,88.75) ; 74,75.5 76,75.5 ; v2(81,76.6) v2(81,80.7) 81,82.928 81.072,83
  Bottom Layer w1: 35,81 35.08,80.92 ENC_VSEL.3@35.08,78.5
  Bottom Layer w3: U9.4@17.8,81 35,81 3.3V.4@42.38,81 3.3V.3@44.92,81 3.3V.2@47.46,81 3.3V.1@50,81
  Bottom Layer w10: U9.4@17.5,81.3 U9.4@17.8,81
  other v2: 72.75,72.273 76,76 68,80.4 68.5,80.8 68.5,81.5 80.6,83
pads on no net: 1C1.0 1C2.0 1C3.0 1D1.0 1D2.0 1D3.0 1H1.1 1H2.1 1R1.0 1R2.0 1R3.0 1R4.0 1R5.0 1R6.0 1R7.0 1R8.0 1R9.0 1R10.0 1R11.0 1R12.0 1R13.0 1R14.0 2C1.0 2C2.0 2C3.0 2D1.0 2D2.0 2D3.0 2H1.1 2H2.1 2R1.0 2R2.0 2R3.0 2R4.0 2R5.0 2R6.0 2R7.0 2R8.0 2R9.0 2R10.0 2R11.0 2R12.0 2R13.0 2R14.0 3C1.0 3C2.0 3C3.0 3D1.0 3D2.0 3D3.0 3H1.1 3H2.1 3R1.0 3R2.0 3R3.0 3R4.0 3R5.0 3R6.0 3R7.0 3R8.0 3R9.0 3R10.0 3R11.0 3R12.0 3R13.0 3R14.0 C51.0 C52.0 C53.0 C62.0 D4.0 FID1.0 FID2.0 FID3.0 FID4.0 FID5.0 FID6.0 FID7.0 J11.4 J12.0 J12.6 J12.7 L2.0 L3.0 MH1.1 R19.0 R20.0 R22.0 R24.0 R34.0 R35.0 R44.0 R45.0 R48.0 R49.0 R50.0 R51.0 R52.0 R53.0 U6.17 U6.21 U6.22 U6.24 U6.25 U6.91 U9.0 U10.0 U10.1
copper on no net:
  other v4: 5,1.9 2.808,2.808 7.192,2.808 1.9,5 8.1,5 2.808,7.192 7.192,7.192 5,8.1

## Polygon pours and split planes (outlines as drawn)
GND on Bottom Layer "M0GNDC" (solid, pour order 56): 141,29.7 141,54.5 134,54.5 134,36.7
GND on Bottom Layer "M0GNDC" (solid, pour order 57): 126.5,29.2 126.5,54.5 119,54.5 119,36.7
GND on Bottom Layer "M0GNDC" (solid, pour order 58): 111.5,29.2 111.5,54.5 104,54.5 104,36.7
DCBUS on Bottom Layer "LDCBUS" (solid, pour order 83): 0,0 21.5,0 21.5,30.061 14,37.561 14,54.5 0,54.5
GND on Bottom Layer "GNDRING" (solid, pour order 86): 64.5,90 64.5,74 67,71.5 83,71.5 85.5,74 85.5,90 83,92.5 67,92.5
VCC on Bottom Layer "VCCRING" (solid, pour order 85): 67.5,89.5 67.5,74.5 82.5,74.5 82.5,89.5
VCC on Bottom Layer "VCC" (solid, pour order 82): 0,100 0,54.5 150,54.5 150,100
3PH_B_Q on Bottom Layer "M0PHB" (solid, pour order 46): 126.5,54.5 133.373,54.5 133.373,36.966 135,35.238 135,12.5 126.5,12.5
3PH_A_Q on Bottom Layer "M0PHA" (solid, pour order 47): 111.5,54.5 118.373,54.5 118.373,37.03 120,35.302 120,12.5 111.5,12.5
DCBUS on Bottom Layer "M0DCBUSB" (solid, pour order 64): 120,10.5 126.5,10.5 126.5,29.2 120,35.7
DCBUS on Bottom Layer "M0DCBUSA" (solid, pour order 65): 105,10.5 111.5,10.5 111.5,29 105,35.5
DCBUS on Bottom Layer "M0DCBUSC" (solid, pour order 66): 135,10.5 141.5,10.5 141.5,29.2 135,35.7
3PH_A on Bottom Layer "M0PHAO" (solid, pour order 73): 108.5,12 115,12 116.5,13.5 120,13.5 120,10.5 125.5,10.5 125.5,0 108.5,0
3PH_B on Bottom Layer "M0PHBO" (solid, pour order 76): 125.5,12 125.5,0 135.5,0 135.5,12
3PH_C on Bottom Layer "M0PHCO" (solid, pour order 79): 135.5,10.5 135.5,0 150,0 150,10.5
3PH_C on Bottom Layer "M0PHC" (solid, pour order 48): 141,54.5 150,54.5 150,33.5 150,4.5 147.5,2 143.5,2 141,4.5
2PH_C on Bottom Layer "M0PHC" (solid, pour order 49): 96,54.5 104,54.5 104,36.7 105.5,35.2 105.5,4.5 103,2 99,2 96,5
GND on Bottom Layer "M0GNDB" (solid, pour order 55): 81,29.7 81,54.5 74,54.5 74,36.7
2PH_B_Q on Bottom Layer "M0PHB" (solid, pour order 50): 81,54.5 88.373,54.5 88.373,36.496 90,34.767 90,12.5 81,12.5
GND on Bottom Layer "M0GNDC" (solid, pour order 59): 96,29.7 96,54.5 89,54.5 89,36.7
GND on Bottom Layer "M0GNDA" (solid, pour order 60): 66,29.7 66,54.5 59,54.5 59,36.7
2PH_A_Q on Bottom Layer "M0PHA" (solid, pour order 51): 66,54.5 73.373,54.5 73.373,36.479 75,34.751 75,12.5 66,12.5
DCBUS on Bottom Layer "M0DCBUSB" (solid, pour order 67): 75.5,11 81.5,11 81.5,29.2 75.5,35.2
DCBUS on Bottom Layer "M0DCBUSA" (solid, pour order 68): 60.5,11 66.5,11 66.5,29.2 60.5,35.2
DCBUS on Bottom Layer "M0DCBUSC" (solid, pour order 69): 90.5,11 96.5,11 96.5,29.2 90.5,35.2
2PH_A on Bottom Layer "M0PHAO" (solid, pour order 74): 63.5,12 70.5,12 72,13.5 75.5,13.5 75.5,10.5 81,10.5 81,0 63.5,0
2PH_B on Bottom Layer "M0PHBO" (solid, pour order 77): 81,12 81,0 91,0 91,12
2PH_C on Bottom Layer "M0PHCO" (solid, pour order 80): 91,10.5 91,0 108.5,0 108.5,10.5
GND on Bottom Layer "M0GNDB" (solid, pour order 61): 36,29.7 36,54.5 29,54.5 29,36.7
1PH_C on Bottom Layer "M0PHC" (solid, pour order 52): 51,54.5 59,54.5 59,36.7 60.5,35.2 60.5,4.5 58,2 54,2 51,5
1PH_B_Q on Bottom Layer "M0PHB" (solid, pour order 53): 36,54.5 43.373,54.5 43.373,36.479 45,34.751 45,12.5 36,12.5
GND on Bottom Layer "M0GNDC" (solid, pour order 62): 51,29.7 51,54.5 44,54.5 44,36.7
GND on Bottom Layer "M0GNDA" (solid, pour order 63): 21,29.7 21,54.5 14,54.5 14,36.7
1PH_A_Q on Bottom Layer "M0PHA" (solid, pour order 54): 21,54.5 28.373,54.5 28.373,36.468 30,34.74 30,12.5 21,12.5
DCBUS on Bottom Layer "M0DCBUSB" (solid, pour order 70): 30.5,11 36.5,11 36.5,29.2 30.5,35.2
DCBUS on Bottom Layer "M0DCBUSA" (solid, pour order 71): 15.5,11 21.5,11 21.5,30.061 15.5,36.061
DCBUS on Bottom Layer "M0DCBUSC" (solid, pour order 72): 45.5,11 51.5,11 51.5,29.2 45.5,35.2
1PH_A on Bottom Layer "M0PHAO" (solid, pour order 75): 21.5,12 25.5,12 27,13.5 30.5,13.5 30.5,10.5 36,10.5 36,0 21.5,0
1PH_B on Bottom Layer "M0PHBO" (solid, pour order 78): 36,12 36,0 46,0 46,12
1PH_C on Bottom Layer "M0PHCO" (solid, pour order 81): 46,10.5 46,0 63.5,0 63.5,10.5
AVCC on Bottom Layer "AVCCRING" (solid, pour order 84): 70,77 80,77 80,87 70,87
GND on Top Layer "BUSGND" (solid, pour order 44): 0,31.5 0,100 150,100 150,31.5
DCBUS on Top Layer "DCBUS" (solid, pour order 45): 0,31.5 0,11 150,11 150,31.5

## Keep-outs
Keep-Out Layer:
  lines w0.5: 0,100 150,100 150,0 0,0 0,77.5 -0.5,77.5 -0.5,82.5 0,82.5 0,100 ; 0,100 0,100

## Silkscreen, mask and mechanical layers (free items; w line width, h text height)
Top Overlay:
  lines w0.2: 20,19 19.5,19.5 ; 20,20 19.5,19.5 ; 23,19.5 19.5,19.5 ; 41.5,19.5 44.5,19.5 ; 44,19 44.5,19.5 ; 44,20 44.5,19.5 ; 65,19 64.5,19.5 ; 65,20 64.5,19.5 ; 68,19.5 64.5,19.5 ; 86.5,19.5 89.5,19.5 ; 89,19 89.5,19.5 ; 89,20 89.5,19.5 ; 110,19 109.5,19.5 ; 110,20 109.5,19.5 ; 113,19.5 109.5,19.5 ; 131.5,19.5 134.5,19.5 ; 134,19 134.5,19.5 ; 134,20 134.5,19.5 ; 19.5,19.5 19.5,19.5 ; 19.5,19.5 19.5,19.5 ; 44.5,19.5 44.5,19.5 ; 44.5,19.5 44.5,19.5 ; 64.5,19.5 64.5,19.5 ; 64.5,19.5 64.5,19.5 ; 89.5,19.5 89.5,19.5 ; 89.5,19.5 89.5,19.5 ; 109.5,19.5 109.5,19.5 ; 109.5,19.5 109.5,19.5 ; 134.5,19.5 134.5,19.5 ; 134.5,19.5 134.5,19.5
  lines w0.4: 12,88 16,88 ; 12,94.5 16,94.5 ; 50.5,88 56.5,88 ; 50.5,94.5 56.5,94.5 ; 58,88 62,88 ; 58,94.5 62,94.5
  text "G" at 13.5,95 h1.27
  text "S" at 53,95 h1.27
  text "G" at 59.5,95 h1.27
  text "V" at 96.25,95 h1.27
  text "A" at 98.75,95 h1.27
  text "B" at 101.25,95 h1.27
  text "Z" at 103.75,95 h1.27
  text "G" at 106.25,95 h1.27
  text "V" at 110.25,95 h1.27
  text "A" at 112.75,95 h1.27
  text "B" at 115.25,95 h1.27
  text "Z" at 117.75,95 h1.27
  text "G" at 120.25,95 h1.27
  text "V" at 124.25,95 h1.27
  text "A" at 126.75,95 h1.27
  text "B" at 129.25,95 h1.27
  text "Z" at 131.75,95 h1.27
  text "G" at 134.25,95 h1.27
  text "20" at 35,94.5 h1.27
  text "G" at 13.5,86 h1.27
  text "S" at 53,86 h1.27
  text "G" at 59.5,86 h1.27
  text "5V" at 30.5,80.25 h1.02 r90
  text "3.3V" at 35.5,80.25 h1.02 r90
  text "Plastic washer" at 24,19 h1.27
  text "Plastic washer" at 69,19 h1.27
  text "Plastic washer" at 114,19 h1.27
Top Solder:
  rectangle: 0,41 147,46
  rectangle: 0,12 147,17
Mechanical 2:
  the board outline again, w0.1

## Text inside footprints (layer, text, board x,y; h text height)
GPIO: Top Overlay "1" at 10.25,89.5 h1.27; Top Overlay "2" at 10,92 h1.27; Top Overlay "40" at 63,92 h1.27; Top Overlay "39" at 63,89 h1.27
J12: Top Overlay "9" at 149.437,79.547 h0.76 r90; Top Overlay "1" at 149.437,69.829 h0.76 r90; Top Overlay "10" at 141.182,80.595 h0.76 r270; Top Overlay "2" at 141.182,70.174 h0.76 r270